# Altium PCB PCB2.PcbDoc
Units mil, origin at the board's own origin, x right, y up, seen from the top; angles counter-clockwise.
Board outline 1755 x 2355 mil, 2 copper layers (Top Layer, Bottom Layer); 36 components, 22 nets, 140 pads, 0 vias.
Unrouted connection lines stored in the file: 73.
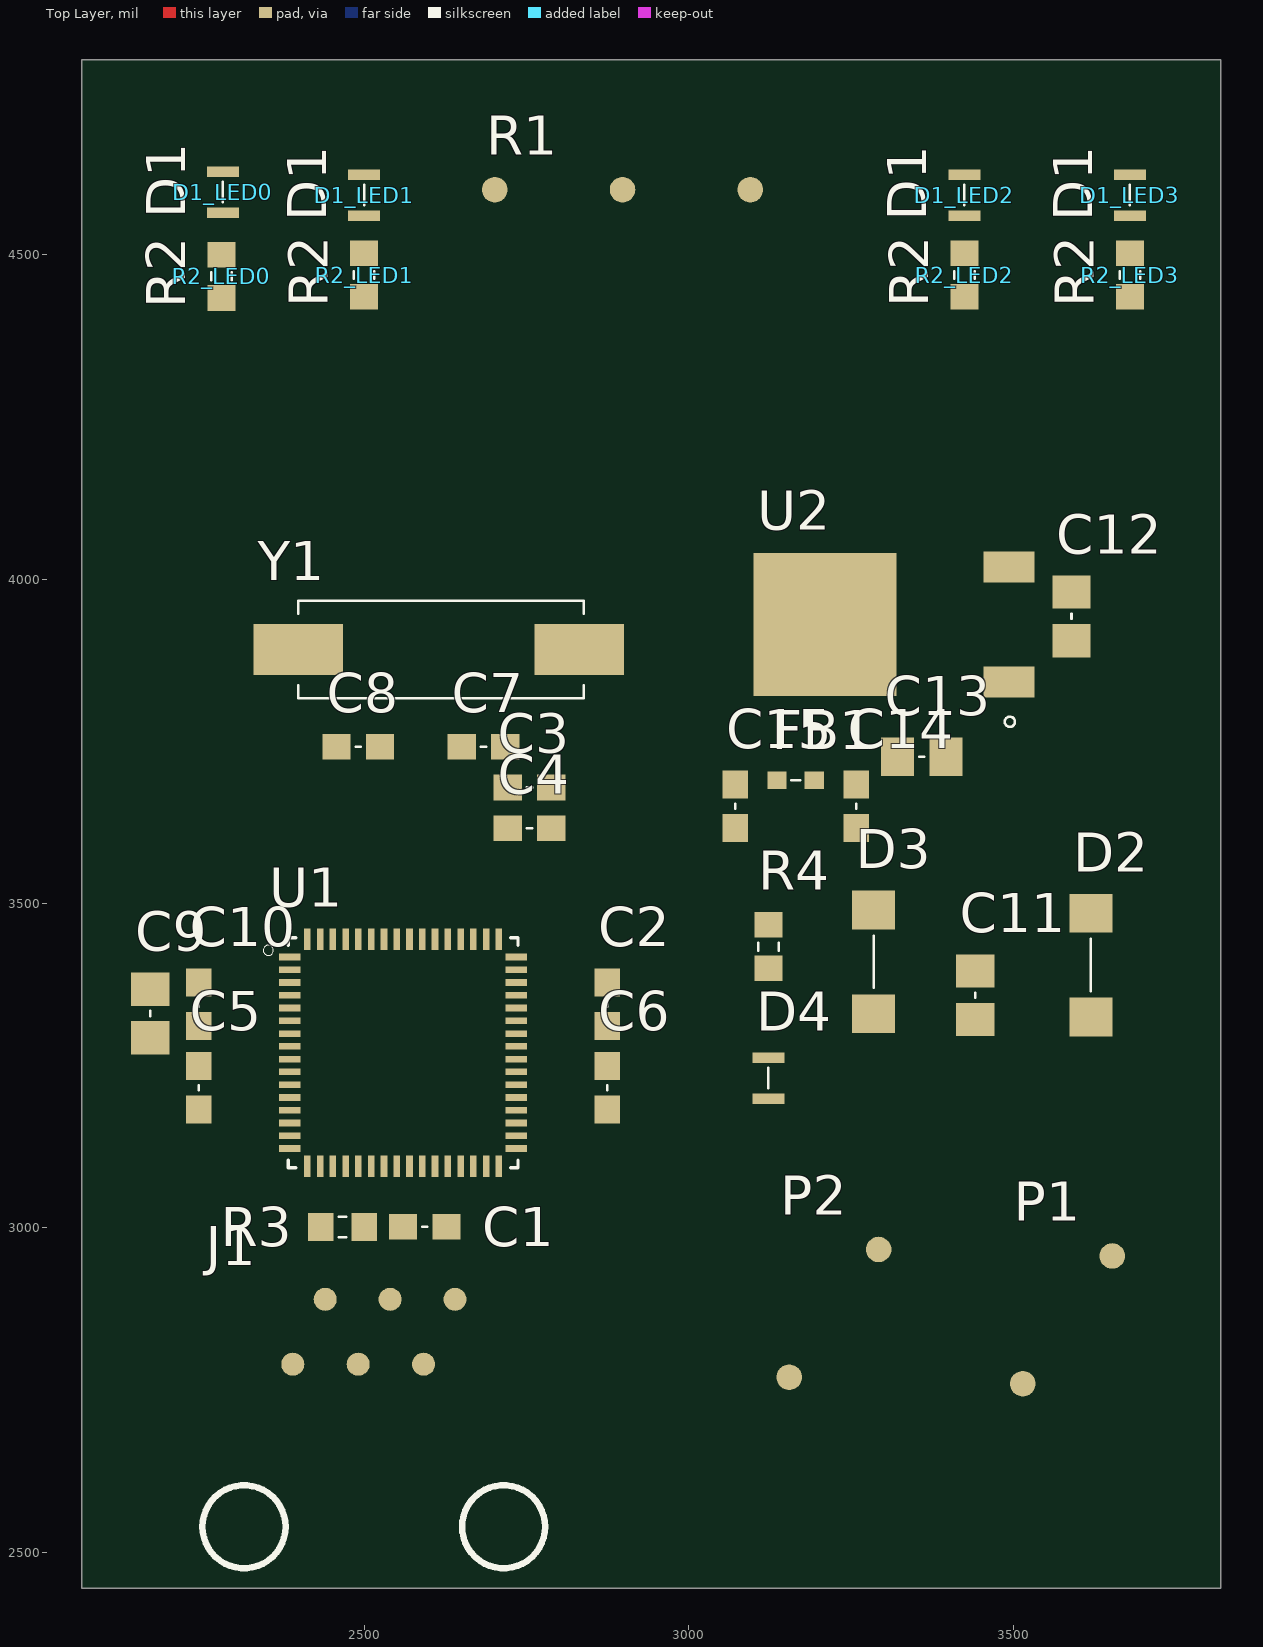
[diagram p0: Top Layer view]
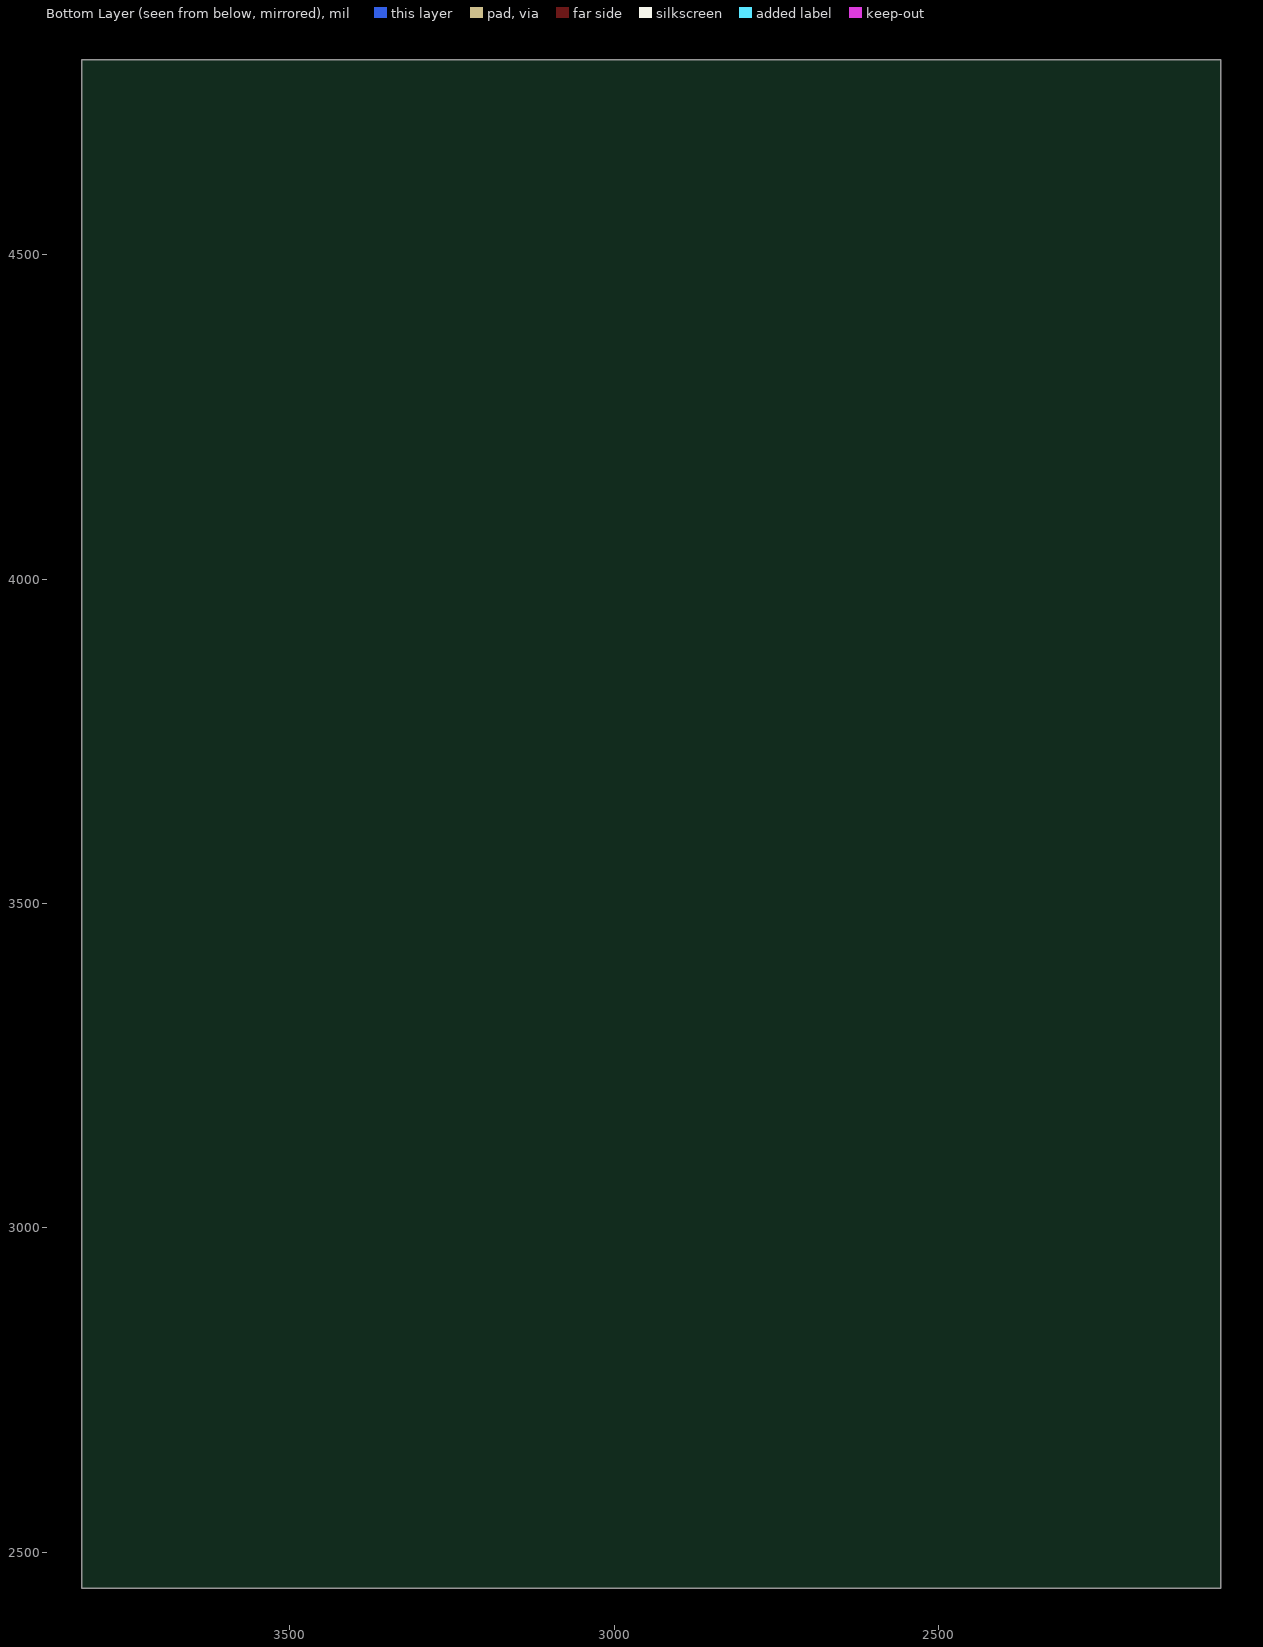
[diagram p1: Bottom Layer view, seen from below]

## Layer stack, top to bottom
Top Solder: solder mask 0.4, Solder Resist, Dk 3.5
Top Layer: signal copper 1.4
Dielectric 1: dielectric 12.6, FR-4, Dk 4.8
Bottom Layer: signal copper 1.4
Bottom Solder: solder mask 0.4, Solder Resist, Dk 3.5

## Board outline
2065,2445 3820,2445 3820,4800 2065,4800

## Design rules (kind name [scope] priority, off if disabled: settings)
Clearance [All] p1: gap=10
PolygonConnect [All] p1: connectstyle=Relief reliefconductorwidth=10 reliefentries=4 polygonreliefangle="90 Angle" airgapwidth=10
RoutingVias [All] p1: holewidth=28 width=50 viastyle="Through Hole" minholewidth=28 minwidth=50 maxholewidth=28 maxwidth=50
SolderMaskExpansion [All] p1: expansion=4
UnpouredPolygon [All] p1: allowunpoured=FALSE
Width [All] p1: maxlimit=10 minlimit=10 preferedwidth=10
29 further rules are at their usual default settings.

## Classes and differential pairs
component class LED0: D1_LED0 R2_LED0
component class LED1: D1_LED1 R2_LED1
component class LED2: D1_LED2 R2_LED2
component class LED3: D1_LED3 R2_LED3
component class PIC: C1 C2 C3 C4 C5 C6 C7 C8 C9 C10 J1 R3 U1 Y1
component class POWER: C11 C12 C13 C14 C15 D2 D3 D4 FB1 P1 P2 R4 U2
component class PROYECTO_PROBOT: R1
net class LED[0..3]: LED0 LED1 LED2 LED3
channel class led: LED0 LED1 LED2 LED3

## Components (designator, comment, footprint, x,y, rotation, side; value= is the part's Value field where it differs from the comment)
C1 "100nF" CAPC1608N 2626.6,3001.61 r180 top
C2 "100nF" CAPC1608N 2874.84,3378 r270 top
C3 "100nF" CAPC1608N 2721.3,3678.78 r0 top
C4 "100nF" CAPC1608N 2721.3,3615.79 r0 top
C5 "100nF" CAPC1608N 2244.93,3182.58 r90 top
C6 "100nF" CAPC1608N 2874.84,3182.58 r90 top
C7 "20pF" CAPC1608N 2650.43,3741.77 r0 top
C8 "20pF" CAPC1608N 2524.45,3741.77 r180 top
C9 "10uF 4V" CAP2012N 2170.12,3367.76 r270 top
C10 "1uF 4V" CAPC1608N 2244.92,3378 r270 top
C11 "Comment" CAP2012N 3441.77,3321.3 r90 top
C12 "Comment" CAP2012N 3590,3905 r90 top
C13 "Comment" CAP2012N 3396.53,3726.02 r180 top
C14 "Comment" CAPC1608N 3258.4,3616.58 r90 top
C15 "Comment" CAPC1608N 3071.69,3616.57 r90 top
D1_LED0 "D1" LED_0805 2282.32,4564.61 r90 top
D1_LED1 "D1" LED_0805 2500,4560 r90 top
D1_LED2 "D1" LED_0805 3425,4560 r90 top
D1_LED3 "D1" LED_0805 3680,4560 r90 top
D2 "GF1A" DO-214AC_21 3620,3485 r270 top
D3 "GF1A" DO-214AC_21 3285,3490 r270 top
D4 "Green LED" LED_0805 3122.87,3262.24 r270 top
FB1 "Comment" INDC1608AN 3193.5,3690 r180 top
J1 "Comment" RJ12_90 2440,2890 r0 top
P1 "Comment" PHOENIX_1985195 3515,2760 r0 top
P2 "Comment" PHOENIX_1985195 3155,2770 r0 top
R1 "1K" PDB181-K415K-102A2 3095,4600 r180 top
R2_LED0 "R2" RESC1608N 2280,4500 r270 top
R2_LED1 "R2" RESC1608N 2500,4501.93 r270 top
R2_LED2 "R2" RESC1608N 3425,4501.93 r270 top
R2_LED3 "R2" RESC1608N 3680,4501.93 r270 top
R3 "4.7K" RESC1608N 2433,3001.61 r0 top
R4 "Comment" RESC1608N 3122.87,3400.04 r90 top
U1 "PIC32MX764F128H-I/PT" QFP50P1200X1200X120-64 2560,3270 r0 top
U2 "" TD03B_N 3210,3930 r90 top
Y1 "8MHz" 4H_SMX_CRYSTAL 2398.46,3891.38 r0 top

## Footprints (in the part's own frame and the unit in brackets; to place one, negate y for a bottom-side part, rotate by r counter-clockwise, add the part's x,y. Pads: shape width x height; smd on the part's side, far side on the other; paste and mask are expansions set on the pad)
4H_SMX_CRYSTAL [mm]
  rect 3.5x2 smd: 1(0,0) 2(11,0)
  silkscreen extent 0,-1.91 11.18,1.91
CAP2012N [mm]
  rect 1.3x1.5 smd: 1(0,0) 2(1.9,0)
  silkscreen extent 0.85,0 1.05,0
CAPC1608N [mm]
  rect 1.1x1 smd: 1(0,0) 2(1.7,0)
  silkscreen extent 0.75,0 0.95,0
DO-214AC_21 [mm] "DO-214-AB/SMC; 2 C-Bend Leads; Body 7.9 x 5.9 mm, inc. leads (LxW)"
  rect 1.52x1.68 smd: 1(0,0) 2(4.06,0)
  silkscreen extent 1,0 3.05,0
INDC1608AN [mm]
  rect 0.75x0.7 smd: 1(0,0) 1(1.45,0)
  silkscreen extent 0.55,0 0.9,0
LED_0805 [mm]
  rect 0.4x1.25 smd: 1(0,0) 2(1.6,0)
  silkscreen extent 0.4,0 1.2,0
PDB181-K415K-102A2 [mm] "Thru-Hole; 3 Leads"
  round 1 smd: 1(0,0) 1(5,0) 1(10,0)
PHOENIX_1985195 [mm]
  round 1 smd: 1(0,0) 1(3.5,5)
QFP50P1200X1200X120-64 [mm]
  rect 0.84x0.26 smd: 1(-4.435,3.75) 2(-4.435,3.25) 3(-4.435,2.75) 4(-4.435,2.25) 5(-4.435,1.75) 6(-4.435,1.25) 7(-4.435,0.75) 8(-4.435,0.25) 9(-4.435,-0.25) 10(-4.435,-0.75) 11(-4.435,-1.25) 12(-4.435,-1.75) 13(-4.435,-2.25) 14(-4.435,-2.75) 15(-4.435,-3.25) 16(-4.435,-3.75) 33(4.435,-3.75) 34(4.435,-3.25) 35(4.435,-2.75) 36(4.435,-2.25) 37(4.435,-1.75) 38(4.435,-1.25) 39(4.435,-0.75) 40(4.435,-0.25) 41(4.435,0.25) 42(4.435,0.75) 43(4.435,1.25) 44(4.435,1.75) 45(4.435,2.25) 46(4.435,2.75) 47(4.435,3.25) 48(4.435,3.75)
  rect 0.26x0.84 smd: 17(-3.75,-4.435) 18(-3.25,-4.435) 19(-2.75,-4.435) 20(-2.25,-4.435) 21(-1.75,-4.435) 22(-1.25,-4.435) 23(-0.75,-4.435) 24(-0.25,-4.435) 25(0.25,-4.435) 26(0.75,-4.435) 27(1.25,-4.435) 28(1.75,-4.435) 29(2.25,-4.435) 30(2.75,-4.435) 31(3.25,-4.435) 32(3.75,-4.435) 49(3.75,4.435) 50(3.25,4.435) 51(2.75,4.435) 52(2.25,4.435) 53(1.75,4.435) 54(1.25,4.435) 55(0.75,4.435) 56(0.25,4.435) 57(-0.25,4.435) 58(-0.75,4.435) 59(-1.25,4.435) 60(-1.75,4.435) 61(-2.25,4.435) 62(-2.75,4.435) 63(-3.25,4.435) 64(-3.75,4.435)
  silkscreen extent -5.47,-4.5 4.5,4.5
RESC1608N [mm]
  rect 1x1.1 smd: 1(0,0) 2(1.7,0)
  silkscreen extent 0.7,-0.4 1,0.4
RJ12_90 [mm]
  round 0.9 smd: 1(0,0) 2(2.54,0) 3(5.08,0) 4(-1.27,-2.54) 5(1.29,-2.54) 6(3.85,-2.54)
  silkscreen extent -4.81,-10.52 8.6,-7.28
TD03B_N [mm]
  rect 5.6x5.6 smd: 1(0,0)
  rect 1.2x2 smd: 2(-2.25,-7.2) 3(2.25,-7.2)
  silkscreen extent -4.01,-7.44 -3.61,-7.04

## Part data
C1 C2 C3 C4 C5 C6 C7 C8 C9 C10 C11 C12 C13 C14 C15: library part Cap, "Capacitor"
D1_LED0 D1_LED1 D1_LED2 D1_LED3: library part LED0, "Typical INFRARED GaAs LED"
D2 D3: library part Diode, "Default Diode"
D4: library part LED2, "Typical RED, GREEN, YELLOW, AMBER GaAs LED"
FB1: library part Inductor, "Inductor"
J1: library part "Header 6", "Header, 6-Pin"
P1 P2: library part "Header 2H", "Header, 2-Pin, Right Angle"
R1: library part RPot, "Potentiometer"
R2_LED0 R2_LED1 R2_LED2 R2_LED3 R3 R4: library part Res1, "Resistor"
U1: library part Component_1
U2: library part MHDR2X2, "Header, 2-Pin, Dual row"
Y1: library part XTAL, "Crystal Oscillator"

## Nets (pads, with @x,y where several pads share a name; then routed paths per layer and width w, separated by ;. In a path a pad name is that pad's centre, name@x,y a point inside that pad or via, vN(x,y) a via of type N, cw(c..) or ccw(c..) an arc to the next point about the centre after c; other vN are vias at no path point)
ALIM: D2.1 P1.1
BATTERY: D3.1 P2.1
GND: C1.2 C2.2 C3.2 C4.2 C5.2 C6.2 C7.2 C8.2 C9.1 C10.1 C11.1 C12.1 C13.1 C14.1 C15.1 D1_LED0.2 D1_LED1.2 D1_LED2.2 D1_LED3.2 D4.2 J1.3 R1.1 U1.9 U1.20 U1.25 U1.41 U2.1
LED0: R2_LED0.2 U1.46
LED1: R2_LED1.2 U1.49
LED2: R2_LED2.2 U1.50
LED3: R2_LED3.2 U1.51
MCLR: J1.1 R3.1 U1.7
NetC9_2: C9.2 C10.2 U1.56
NetD1_LED0_1: D1_LED0.1 R2_LED0.1
NetD1_LED1_1: D1_LED1.1 R2_LED1.1
NetD1_LED2_1: D1_LED2.1 R2_LED2.1
NetD1_LED3_1: D1_LED3.1 R2_LED3.1
NetD4_1: D4.1 R4.1
NetR1_3: U1.14
PGC: J1.5 U1.15
PGD: J1.4 U1.16
V3P3: C1.1 C2.1 C3.1 C4.1 C5.1 C13.2 C14.2 FB1.1 J1.2 R3.2 U1.10 U1.26 U1.35 U1.38 U1.57
V3P3A: C6.1 C15.2 U1.19
V5: C11.2 C12.2 D2.2 D3.2 R4.2 U2.3
X1: C7.1 U1.39 Y1.2
X2: C8.1 U1.40 Y1.1
pads on no net: J1.6 U1.1 U1.2 U1.3 U1.4 U1.5 U1.6 U1.8 U1.11 U1.12 U1.13 U1.17 U1.18 U1.21 U1.22 U1.23 U1.24 U1.27 U1.28 U1.29 U1.30 U1.31 U1.32 U1.33 U1.34 U1.36 U1.37 U1.42 U1.43 U1.44 U1.45 U1.47 U1.48 U1.52 U1.53 U1.54 U1.55 U1.58 U1.59 U1.60 U1.61 U1.62 U1.63 U1.64 U2.2

## Silkscreen, mask and mechanical layers (free items; w line width, h text height)
Drill Drawing:
  lines w15: 1700,1740 1700,2040 ; 2397.81,1740 2397.81,2040 ; 3743.42,1740 3743.42,2040 ; 4249.29,1740 4249.29,2040 ; 1149.12,1740 5028.1,1740 5028.1,2040 1149.12,2040 1149.12,1740 ; 1149.12,1890 5028.1,1890 1149.12,1890
  text "Symbol" at 1239.12,1935 h72
  text "Hit Count" at 1745,1935 h72
  text "Finished Hole Size" at 2442.81,1935 h72
  text "Plated" at 3788.42,1935 h72
  text "Hole Type" at 4294.29,1935 h72
Board outline:
  the board outline again, w7.87

## Dimensions
2065,2445 to 3820,2445 on Mechanical 16
2065,2445 to 2065,4800 on Mechanical 16